# EAGLE board SHT1x-Breakout-Panel-v14 (EAGLE 7.3.0), part 1 of 2
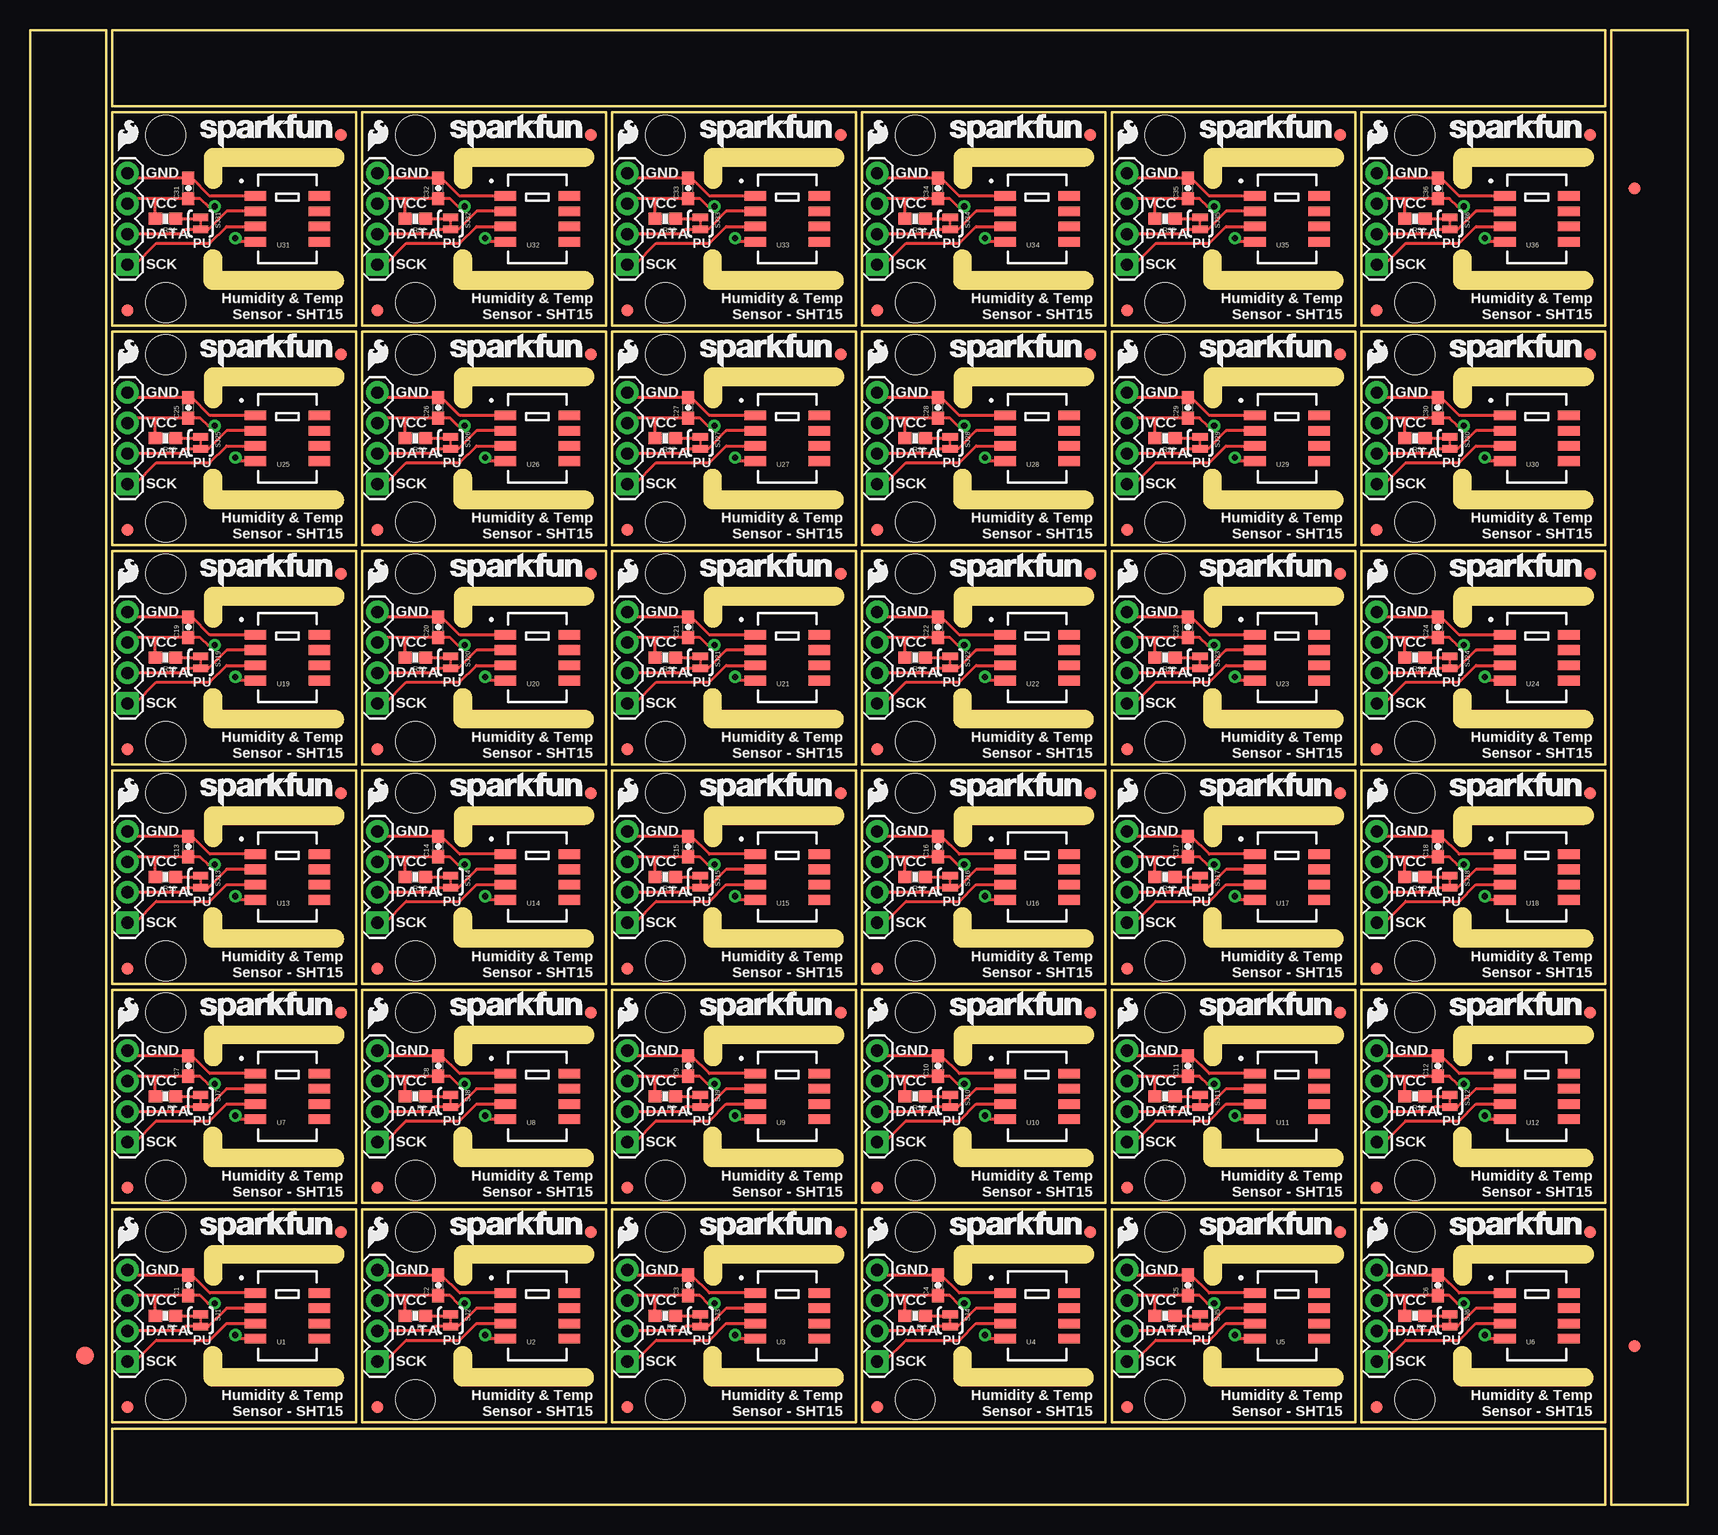
[diagram p0: board, top side]
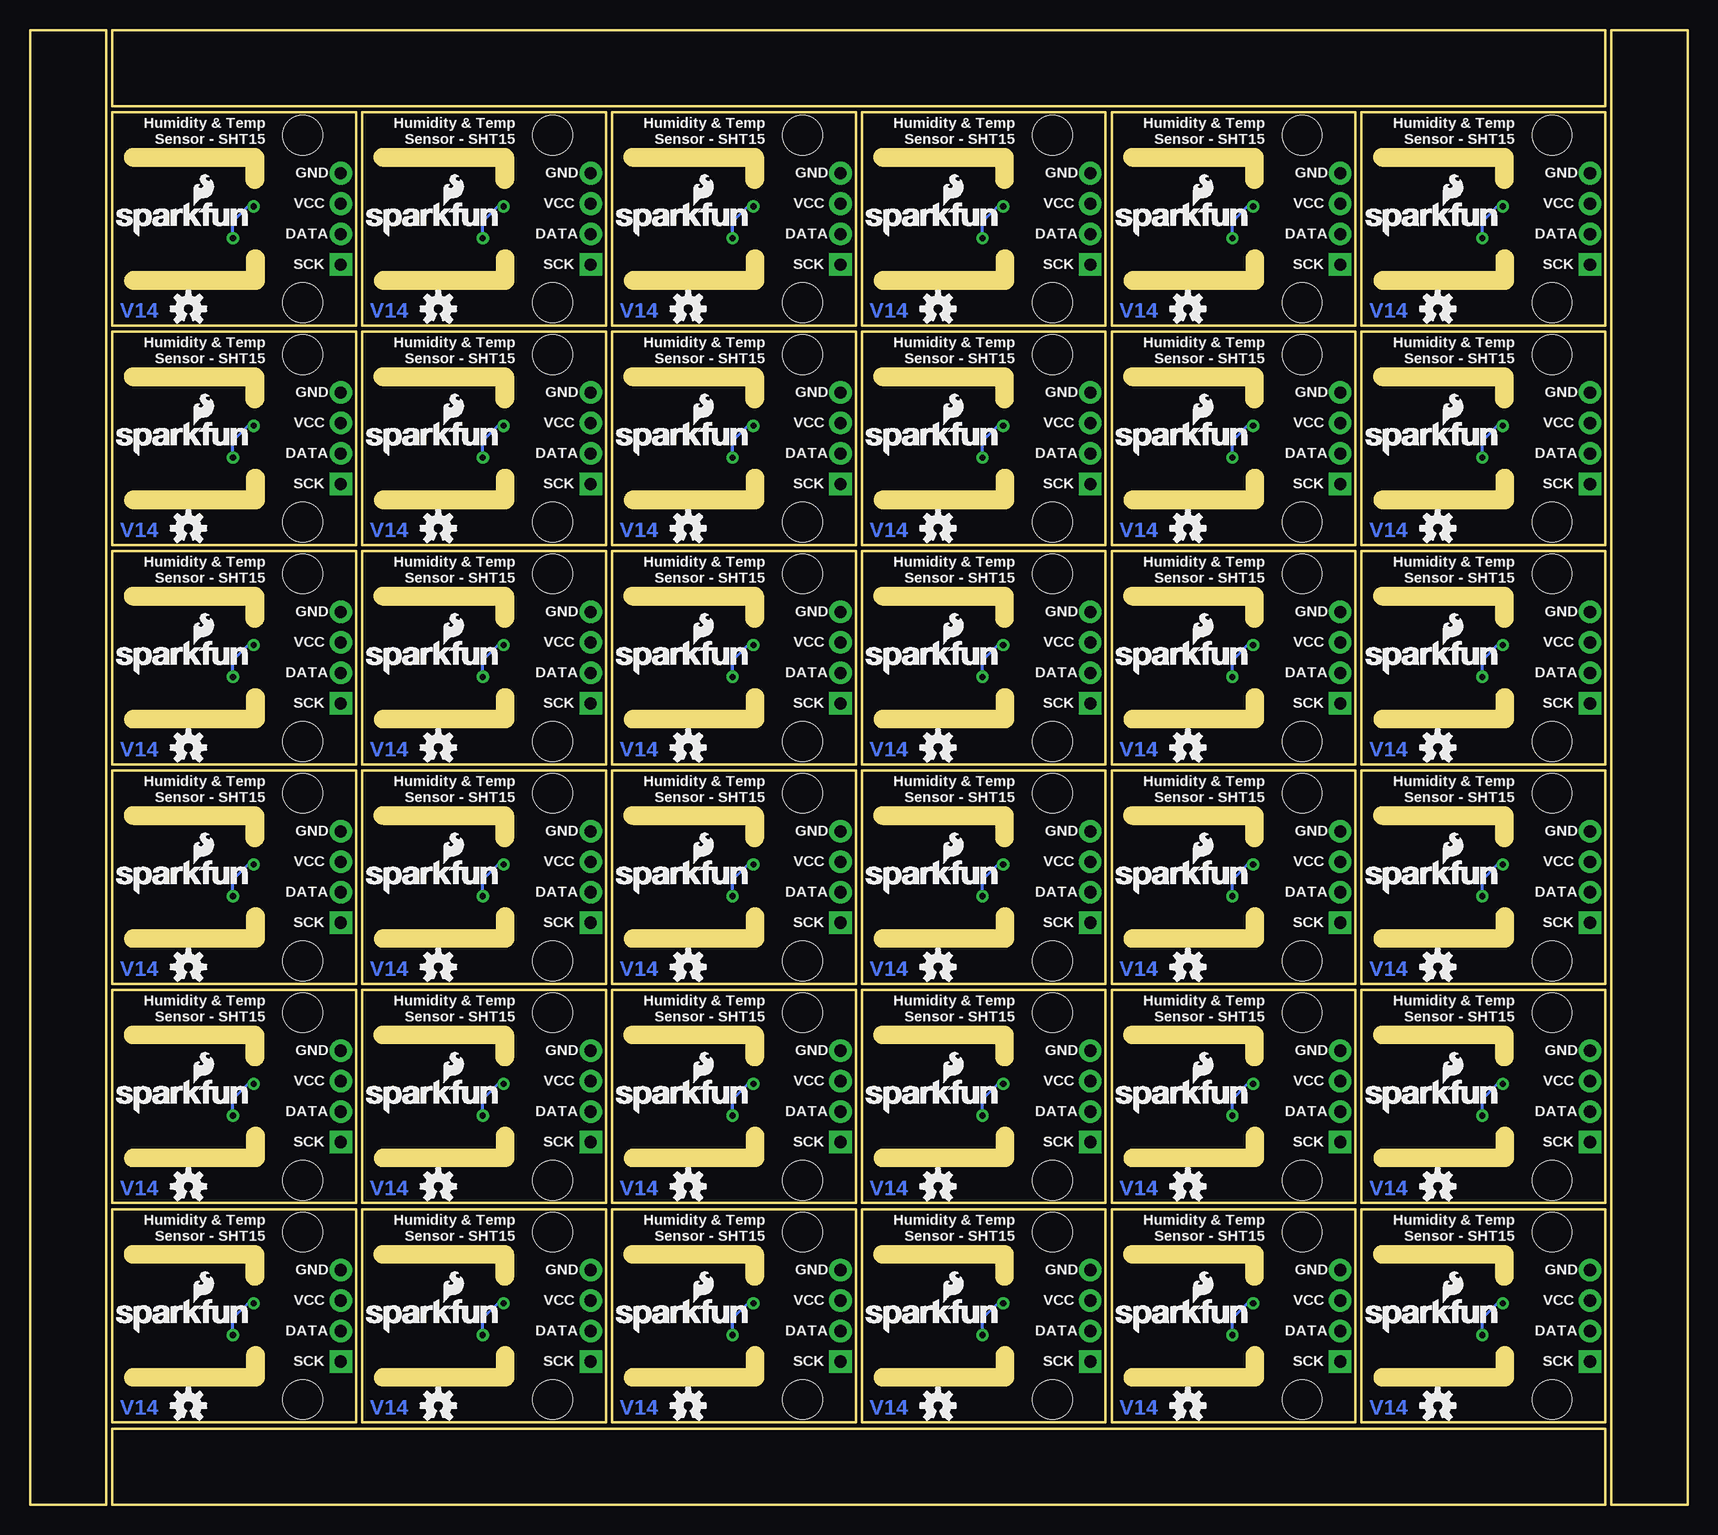
[diagram p1: board, bottom side, seen from below]

Size 138.18 x 122.94 mm. Coordinates in mm from the lower left corner, seen from the top.
Outline: 808 segments
Copper layers (1*16): Top 0.035mm / dielectric 1.5mm / Bottom 0.035mm
Design rules "SparkFun": minimum track width 8mil, minimum drill 20mil, track to track 8mil, track to pad 8mil, pad to pad 8mil, via to via 8mil, smd to smd 8mil, copper to edge 9mil, drill to drill 8mil, minimum pad ring 12mil, minimum via ring 10mil, stop-mask expansion 4mil, vias tented up to drill 20mil, thermal gap 10mil
Net classes: 0 default: width 0.203 mm; 1 power: width 0.305 mm
Milling: 144 lines

## Footprints (pad centres in the part's own frame; a part is rotated, then mirrored left to right if it is on the bottom)
0603-CAP = smd 1.1 x 1: 1 -0.85,0; 2 0.85,0
FIDUCIAL-1.5X3 = smd 1.5 x 1.5: 1 0,0
FIDUCIAL-1X2 = smd 1 x 1: 1 0,0
1X04 = drill 1.016 pad 1.88 square: 1 0,0 | drill 1.016 pad 1.88: 2 2.54,0; 3 5.08,0; 4 7.62,0
0603-RES = smd 1.1 x 1: 1 -0.85,0; 2 0.85,0
PAD-JUMPER-2-NC_BY_TRACE_YES_SILK = smd 0.635 x 1.27: 1 -0.508,0; 2 0.508,0
STAND-OFF = hole 3.302: 0,0
SHT1X = smd 1.8 x 0.8: 1 -2.667,1.905; 2 -2.667,0.635; 3 -2.667,-0.635; 4 -2.667,-1.905; 5 2.667,-1.905; 6 2.667,-0.635; 7 2.667,0.635; 8 2.667,1.905

## Placement (x,y rotation side)
C1  0.1uF  [0603-CAP]  13.21,18.29 90 top
C2  0.1uF  [0603-CAP]  34.04,18.29 90 top
C3  0.1uF  [0603-CAP]  54.86,18.29 90 top
C4  0.1uF  [0603-CAP]  75.69,18.29 90 top
C5  0.1uF  [0603-CAP]  96.52,18.29 90 top
C6  0.1uF  [0603-CAP]  117.35,18.29 90 top
C7  0.1uF  [0603-CAP]  13.21,36.58 90 top
C8  0.1uF  [0603-CAP]  34.04,36.58 90 top
C9  0.1uF  [0603-CAP]  54.86,36.58 90 top
C10  0.1uF  [0603-CAP]  75.69,36.58 90 top
C11  0.1uF  [0603-CAP]  96.52,36.58 90 top
C12  0.1uF  [0603-CAP]  117.35,36.58 90 top
C13  0.1uF  [0603-CAP]  13.21,54.86 90 top
C14  0.1uF  [0603-CAP]  34.04,54.86 90 top
C15  0.1uF  [0603-CAP]  54.86,54.86 90 top
C16  0.1uF  [0603-CAP]  75.69,54.86 90 top
C17  0.1uF  [0603-CAP]  96.52,54.86 90 top
C18  0.1uF  [0603-CAP]  117.35,54.86 90 top
C19  0.1uF  [0603-CAP]  13.21,73.15 90 top
C20  0.1uF  [0603-CAP]  34.04,73.15 90 top
C21  0.1uF  [0603-CAP]  54.86,73.15 90 top
C22  0.1uF  [0603-CAP]  75.69,73.15 90 top
C23  0.1uF  [0603-CAP]  96.52,73.15 90 top
C24  0.1uF  [0603-CAP]  117.35,73.15 90 top
C25  0.1uF  [0603-CAP]  13.21,91.44 90 top
C26  0.1uF  [0603-CAP]  34.04,91.44 90 top
C27  0.1uF  [0603-CAP]  54.86,91.44 90 top
C28  0.1uF  [0603-CAP]  75.69,91.44 90 top
C29  0.1uF  [0603-CAP]  96.52,91.44 90 top
C30  0.1uF  [0603-CAP]  117.35,91.44 90 top
C31  0.1uF  [0603-CAP]  13.21,109.73 90 top
C32  0.1uF  [0603-CAP]  34.04,109.73 90 top
C33  0.1uF  [0603-CAP]  54.86,109.73 90 top
C34  0.1uF  [0603-CAP]  75.69,109.73 90 top
C35  0.1uF  [0603-CAP]  96.52,109.73 90 top
C36  0.1uF  [0603-CAP]  117.35,109.73 90 top
E$1  [FIDUCIAL-1.5X3]  4.57,12.45 0 top
E$4  [FIDUCIAL-1X2]  133.73,13.21 0 top
E$5  [FIDUCIAL-1X2]  133.73,109.73 180 top
FID1  FIDUCIAL1X2  [FIDUCIAL-1X2]  25.91,22.73 0 top
FID2  FIDUCIAL1X2  [FIDUCIAL-1X2]  8.13,8.13 0 top
FID3  FIDUCIAL1X2  [FIDUCIAL-1X2]  46.74,22.73 0 top
FID4  FIDUCIAL1X2  [FIDUCIAL-1X2]  28.96,8.13 0 top
FID5  FIDUCIAL1X2  [FIDUCIAL-1X2]  67.56,22.73 0 top
FID6  FIDUCIAL1X2  [FIDUCIAL-1X2]  49.78,8.13 0 top
FID7  FIDUCIAL1X2  [FIDUCIAL-1X2]  88.39,22.73 0 top
FID8  FIDUCIAL1X2  [FIDUCIAL-1X2]  70.61,8.13 0 top
FID9  FIDUCIAL1X2  [FIDUCIAL-1X2]  109.22,22.73 0 top
FID10  FIDUCIAL1X2  [FIDUCIAL-1X2]  91.44,8.13 0 top
FID11  FIDUCIAL1X2  [FIDUCIAL-1X2]  130.05,22.73 0 top
FID12  FIDUCIAL1X2  [FIDUCIAL-1X2]  112.27,8.13 0 top
FID13  FIDUCIAL1X2  [FIDUCIAL-1X2]  25.91,41.02 0 top
FID14  FIDUCIAL1X2  [FIDUCIAL-1X2]  8.13,26.42 0 top
FID15  FIDUCIAL1X2  [FIDUCIAL-1X2]  46.74,41.02 0 top
FID16  FIDUCIAL1X2  [FIDUCIAL-1X2]  28.96,26.42 0 top
FID17  FIDUCIAL1X2  [FIDUCIAL-1X2]  67.56,41.02 0 top
FID18  FIDUCIAL1X2  [FIDUCIAL-1X2]  49.78,26.42 0 top
FID19  FIDUCIAL1X2  [FIDUCIAL-1X2]  88.39,41.02 0 top
FID20  FIDUCIAL1X2  [FIDUCIAL-1X2]  70.61,26.42 0 top
FID21  FIDUCIAL1X2  [FIDUCIAL-1X2]  109.22,41.02 0 top
FID22  FIDUCIAL1X2  [FIDUCIAL-1X2]  91.44,26.42 0 top
FID23  FIDUCIAL1X2  [FIDUCIAL-1X2]  130.05,41.02 0 top
FID24  FIDUCIAL1X2  [FIDUCIAL-1X2]  112.27,26.42 0 top
FID25  FIDUCIAL1X2  [FIDUCIAL-1X2]  25.91,59.31 0 top
FID26  FIDUCIAL1X2  [FIDUCIAL-1X2]  8.13,44.7 0 top
FID27  FIDUCIAL1X2  [FIDUCIAL-1X2]  46.74,59.31 0 top
FID28  FIDUCIAL1X2  [FIDUCIAL-1X2]  28.96,44.7 0 top
FID29  FIDUCIAL1X2  [FIDUCIAL-1X2]  67.56,59.31 0 top
FID30  FIDUCIAL1X2  [FIDUCIAL-1X2]  49.78,44.7 0 top
FID31  FIDUCIAL1X2  [FIDUCIAL-1X2]  88.39,59.31 0 top
FID32  FIDUCIAL1X2  [FIDUCIAL-1X2]  70.61,44.7 0 top
FID33  FIDUCIAL1X2  [FIDUCIAL-1X2]  109.22,59.31 0 top
FID34  FIDUCIAL1X2  [FIDUCIAL-1X2]  91.44,44.7 0 top
FID35  FIDUCIAL1X2  [FIDUCIAL-1X2]  130.05,59.31 0 top
FID36  FIDUCIAL1X2  [FIDUCIAL-1X2]  112.27,44.7 0 top
FID37  FIDUCIAL1X2  [FIDUCIAL-1X2]  25.91,77.6 0 top
FID38  FIDUCIAL1X2  [FIDUCIAL-1X2]  8.13,62.99 0 top
FID39  FIDUCIAL1X2  [FIDUCIAL-1X2]  46.74,77.6 0 top
FID40  FIDUCIAL1X2  [FIDUCIAL-1X2]  28.96,62.99 0 top
FID41  FIDUCIAL1X2  [FIDUCIAL-1X2]  67.56,77.6 0 top
FID42  FIDUCIAL1X2  [FIDUCIAL-1X2]  49.78,62.99 0 top
FID43  FIDUCIAL1X2  [FIDUCIAL-1X2]  88.39,77.6 0 top
FID44  FIDUCIAL1X2  [FIDUCIAL-1X2]  70.61,62.99 0 top
FID45  FIDUCIAL1X2  [FIDUCIAL-1X2]  109.22,77.6 0 top
FID46  FIDUCIAL1X2  [FIDUCIAL-1X2]  91.44,62.99 0 top
FID47  FIDUCIAL1X2  [FIDUCIAL-1X2]  130.05,77.6 0 top
FID48  FIDUCIAL1X2  [FIDUCIAL-1X2]  112.27,62.99 0 top
FID49  FIDUCIAL1X2  [FIDUCIAL-1X2]  25.91,95.89 0 top
FID50  FIDUCIAL1X2  [FIDUCIAL-1X2]  8.13,81.28 0 top
FID51  FIDUCIAL1X2  [FIDUCIAL-1X2]  46.74,95.89 0 top
FID52  FIDUCIAL1X2  [FIDUCIAL-1X2]  28.96,81.28 0 top
FID53  FIDUCIAL1X2  [FIDUCIAL-1X2]  67.56,95.89 0 top
FID54  FIDUCIAL1X2  [FIDUCIAL-1X2]  49.78,81.28 0 top
FID55  FIDUCIAL1X2  [FIDUCIAL-1X2]  88.39,95.89 0 top
FID56  FIDUCIAL1X2  [FIDUCIAL-1X2]  70.61,81.28 0 top
FID57  FIDUCIAL1X2  [FIDUCIAL-1X2]  109.22,95.89 0 top
FID58  FIDUCIAL1X2  [FIDUCIAL-1X2]  91.44,81.28 0 top
FID59  FIDUCIAL1X2  [FIDUCIAL-1X2]  130.05,95.89 0 top
FID60  FIDUCIAL1X2  [FIDUCIAL-1X2]  112.27,81.28 0 top
FID61  FIDUCIAL1X2  [FIDUCIAL-1X2]  25.91,114.17 0 top
FID62  FIDUCIAL1X2  [FIDUCIAL-1X2]  8.13,99.57 0 top
FID63  FIDUCIAL1X2  [FIDUCIAL-1X2]  46.74,114.17 0 top
FID64  FIDUCIAL1X2  [FIDUCIAL-1X2]  28.96,99.57 0 top
FID65  FIDUCIAL1X2  [FIDUCIAL-1X2]  67.56,114.17 0 top
FID66  FIDUCIAL1X2  [FIDUCIAL-1X2]  49.78,99.57 0 top
FID67  FIDUCIAL1X2  [FIDUCIAL-1X2]  88.39,114.17 0 top
FID68  FIDUCIAL1X2  [FIDUCIAL-1X2]  70.61,99.57 0 top
FID69  FIDUCIAL1X2  [FIDUCIAL-1X2]  109.22,114.17 0 top
FID70  FIDUCIAL1X2  [FIDUCIAL-1X2]  91.44,99.57 0 top
FID71  FIDUCIAL1X2  [FIDUCIAL-1X2]  130.05,114.17 0 top
FID72  FIDUCIAL1X2  [FIDUCIAL-1X2]  112.27,99.57 0 top
JP1  [1X04]  8.13,11.94 90 top
JP2  [1X04]  28.96,11.94 90 top
JP3  [1X04]  49.78,11.94 90 top
JP4  [1X04]  70.61,11.94 90 top
JP5  [1X04]  91.44,11.94 90 top
JP6  [1X04]  112.27,11.94 90 top
JP7  [1X04]  8.13,30.23 90 top
JP8  [1X04]  28.96,30.23 90 top
JP9  [1X04]  49.78,30.23 90 top
JP10  [1X04]  70.61,30.23 90 top
JP11  [1X04]  91.44,30.23 90 top
JP12  [1X04]  112.27,30.23 90 top
JP13  [1X04]  8.13,48.51 90 top
JP14  [1X04]  28.96,48.51 90 top
JP15  [1X04]  49.78,48.51 90 top
JP16  [1X04]  70.61,48.51 90 top
JP17  [1X04]  91.44,48.51 90 top
JP18  [1X04]  112.27,48.51 90 top
JP19  [1X04]  8.13,66.8 90 top
JP20  [1X04]  28.96,66.8 90 top
JP21  [1X04]  49.78,66.8 90 top
JP22  [1X04]  70.61,66.8 90 top
JP23  [1X04]  91.44,66.8 90 top
JP24  [1X04]  112.27,66.8 90 top
JP25  [1X04]  8.13,85.09 90 top
JP26  [1X04]  28.96,85.09 90 top
JP27  [1X04]  49.78,85.09 90 top
JP28  [1X04]  70.61,85.09 90 top
JP29  [1X04]  91.44,85.09 90 top
JP30  [1X04]  112.27,85.09 90 top
JP31  [1X04]  8.13,103.38 90 top
JP32  [1X04]  28.96,103.38 90 top
JP33  [1X04]  49.78,103.38 90 top
JP34  [1X04]  70.61,103.38 90 top
JP35  [1X04]  91.44,103.38 90 top
JP36  [1X04]  112.27,103.38 90 top
LOGO1  OSHW-LOGOS  [OSHW-LOGO-S]  20.83,8.26 0 bottom
LOGO2  SFE_LOGO_NAME.1_INCH  [SFE_LOGO_NAME_.1]  13.74,21.18 0 top
LOGO3  OSHW-LOGOS  [OSHW-LOGO-S]  41.66,8.26 0 bottom
LOGO4  SFE_LOGO_FLAME.1_INCH  [SFE_LOGO_FLAME_.1]  7.04,21.06 0 top
LOGO5  SFE_LOGO_NAME_FLAME.1_INCH  [SFE_LOGO_NAME_FLAME_.1]  27.25,14.22 0 bottom
LOGO6  SFE_LOGO_FLAME.1_INCH  [SFE_LOGO_FLAME_.1]  27.86,21.06 0 top
LOGO7  SFE_LOGO_NAME.1_INCH  [SFE_LOGO_NAME_.1]  34.57,21.18 0 top
LOGO8  SFE_LOGO_NAME_FLAME.1_INCH  [SFE_LOGO_NAME_FLAME_.1]  48.08,14.22 0 bottom
LOGO9  OSHW-LOGOS  [OSHW-LOGO-S]  62.48,8.26 0 bottom
LOGO10  SFE_LOGO_FLAME.1_INCH  [SFE_LOGO_FLAME_.1]  48.69,21.06 0 top
LOGO11  SFE_LOGO_NAME.1_INCH  [SFE_LOGO_NAME_.1]  55.4,21.18 0 top
LOGO12  SFE_LOGO_NAME_FLAME.1_INCH  [SFE_LOGO_NAME_FLAME_.1]  68.91,14.22 0 bottom
LOGO13  OSHW-LOGOS  [OSHW-LOGO-S]  83.31,8.26 0 bottom
LOGO14  SFE_LOGO_FLAME.1_INCH  [SFE_LOGO_FLAME_.1]  69.52,21.06 0 top
LOGO15  SFE_LOGO_NAME.1_INCH  [SFE_LOGO_NAME_.1]  76.23,21.18 0 top
LOGO16  SFE_LOGO_NAME_FLAME.1_INCH  [SFE_LOGO_NAME_FLAME_.1]  89.74,14.22 0 bottom
LOGO17  OSHW-LOGOS  [OSHW-LOGO-S]  104.14,8.26 0 bottom
LOGO18  SFE_LOGO_FLAME.1_INCH  [SFE_LOGO_FLAME_.1]  90.35,21.06 0 top
LOGO19  SFE_LOGO_NAME.1_INCH  [SFE_LOGO_NAME_.1]  97.05,21.18 0 top
LOGO20  SFE_LOGO_NAME_FLAME.1_INCH  [SFE_LOGO_NAME_FLAME_.1]  110.57,14.22 0 bottom
LOGO21  OSHW-LOGOS  [OSHW-LOGO-S]  124.97,8.26 0 bottom
LOGO22  SFE_LOGO_FLAME.1_INCH  [SFE_LOGO_FLAME_.1]  111.18,21.06 0 top
LOGO23  SFE_LOGO_NAME.1_INCH  [SFE_LOGO_NAME_.1]  117.88,21.18 0 top
LOGO24  SFE_LOGO_NAME_FLAME.1_INCH  [SFE_LOGO_NAME_FLAME_.1]  131.39,14.22 0 bottom
LOGO25  OSHW-LOGOS  [OSHW-LOGO-S]  20.83,26.54 0 bottom
LOGO26  SFE_LOGO_FLAME.1_INCH  [SFE_LOGO_FLAME_.1]  7.04,39.34 0 top
LOGO27  SFE_LOGO_NAME.1_INCH  [SFE_LOGO_NAME_.1]  13.74,39.47 0 top
LOGO28  SFE_LOGO_NAME_FLAME.1_INCH  [SFE_LOGO_NAME_FLAME_.1]  27.25,32.51 0 bottom
LOGO29  OSHW-LOGOS  [OSHW-LOGO-S]  41.66,26.54 0 bottom
LOGO30  SFE_LOGO_FLAME.1_INCH  [SFE_LOGO_FLAME_.1]  27.86,39.34 0 top
LOGO31  SFE_LOGO_NAME.1_INCH  [SFE_LOGO_NAME_.1]  34.57,39.47 0 top
LOGO32  SFE_LOGO_NAME_FLAME.1_INCH  [SFE_LOGO_NAME_FLAME_.1]  48.08,32.51 0 bottom
LOGO33  OSHW-LOGOS  [OSHW-LOGO-S]  62.48,26.54 0 bottom
LOGO34  SFE_LOGO_FLAME.1_INCH  [SFE_LOGO_FLAME_.1]  48.69,39.34 0 top
LOGO35  SFE_LOGO_NAME.1_INCH  [SFE_LOGO_NAME_.1]  55.4,39.47 0 top
LOGO36  SFE_LOGO_NAME_FLAME.1_INCH  [SFE_LOGO_NAME_FLAME_.1]  68.91,32.51 0 bottom
LOGO37  OSHW-LOGOS  [OSHW-LOGO-S]  83.31,26.54 0 bottom
LOGO38  SFE_LOGO_FLAME.1_INCH  [SFE_LOGO_FLAME_.1]  69.52,39.34 0 top
LOGO39  SFE_LOGO_NAME.1_INCH  [SFE_LOGO_NAME_.1]  76.23,39.47 0 top
LOGO40  SFE_LOGO_NAME_FLAME.1_INCH  [SFE_LOGO_NAME_FLAME_.1]  89.74,32.51 0 bottom
LOGO41  OSHW-LOGOS  [OSHW-LOGO-S]  104.14,26.54 0 bottom
LOGO42  SFE_LOGO_FLAME.1_INCH  [SFE_LOGO_FLAME_.1]  90.35,39.34 0 top
LOGO43  SFE_LOGO_NAME.1_INCH  [SFE_LOGO_NAME_.1]  97.05,39.47 0 top
LOGO44  SFE_LOGO_NAME_FLAME.1_INCH  [SFE_LOGO_NAME_FLAME_.1]  110.57,32.51 0 bottom
LOGO45  OSHW-LOGOS  [OSHW-LOGO-S]  124.97,26.54 0 bottom
LOGO46  SFE_LOGO_FLAME.1_INCH  [SFE_LOGO_FLAME_.1]  111.18,39.34 0 top
LOGO47  SFE_LOGO_NAME.1_INCH  [SFE_LOGO_NAME_.1]  117.88,39.47 0 top
LOGO48  SFE_LOGO_NAME_FLAME.1_INCH  [SFE_LOGO_NAME_FLAME_.1]  131.39,32.51 0 bottom
LOGO49  OSHW-LOGOS  [OSHW-LOGO-S]  20.83,44.83 0 bottom
LOGO50  SFE_LOGO_FLAME.1_INCH  [SFE_LOGO_FLAME_.1]  7.04,57.63 0 top
LOGO51  SFE_LOGO_NAME.1_INCH  [SFE_LOGO_NAME_.1]  13.74,57.76 0 top
LOGO52  SFE_LOGO_NAME_FLAME.1_INCH  [SFE_LOGO_NAME_FLAME_.1]  27.25,50.8 0 bottom
LOGO53  OSHW-LOGOS  [OSHW-LOGO-S]  41.66,44.83 0 bottom
LOGO54  SFE_LOGO_FLAME.1_INCH  [SFE_LOGO_FLAME_.1]  27.86,57.63 0 top
LOGO55  SFE_LOGO_NAME.1_INCH  [SFE_LOGO_NAME_.1]  34.57,57.76 0 top
LOGO56  SFE_LOGO_NAME_FLAME.1_INCH  [SFE_LOGO_NAME_FLAME_.1]  48.08,50.8 0 bottom
LOGO57  OSHW-LOGOS  [OSHW-LOGO-S]  62.48,44.83 0 bottom
LOGO58  SFE_LOGO_FLAME.1_INCH  [SFE_LOGO_FLAME_.1]  48.69,57.63 0 top
LOGO59  SFE_LOGO_NAME.1_INCH  [SFE_LOGO_NAME_.1]  55.4,57.76 0 top
LOGO60  SFE_LOGO_NAME_FLAME.1_INCH  [SFE_LOGO_NAME_FLAME_.1]  68.91,50.8 0 bottom
LOGO61  OSHW-LOGOS  [OSHW-LOGO-S]  83.31,44.83 0 bottom
LOGO62  SFE_LOGO_FLAME.1_INCH  [SFE_LOGO_FLAME_.1]  69.52,57.63 0 top
LOGO63  SFE_LOGO_NAME.1_INCH  [SFE_LOGO_NAME_.1]  76.23,57.76 0 top
LOGO64  SFE_LOGO_NAME_FLAME.1_INCH  [SFE_LOGO_NAME_FLAME_.1]  89.74,50.8 0 bottom
LOGO65  OSHW-LOGOS  [OSHW-LOGO-S]  104.14,44.83 0 bottom
LOGO66  SFE_LOGO_FLAME.1_INCH  [SFE_LOGO_FLAME_.1]  90.35,57.63 0 top
LOGO67  SFE_LOGO_NAME.1_INCH  [SFE_LOGO_NAME_.1]  97.05,57.76 0 top
LOGO68  SFE_LOGO_NAME_FLAME.1_INCH  [SFE_LOGO_NAME_FLAME_.1]  110.57,50.8 0 bottom
LOGO69  OSHW-LOGOS  [OSHW-LOGO-S]  124.97,44.83 0 bottom
LOGO70  SFE_LOGO_FLAME.1_INCH  [SFE_LOGO_FLAME_.1]  111.18,57.63 0 top
LOGO71  SFE_LOGO_NAME.1_INCH  [SFE_LOGO_NAME_.1]  117.88,57.76 0 top
LOGO72  SFE_LOGO_NAME_FLAME.1_INCH  [SFE_LOGO_NAME_FLAME_.1]  131.39,50.8 0 bottom
LOGO73  OSHW-LOGOS  [OSHW-LOGO-S]  20.83,63.12 0 bottom
LOGO74  SFE_LOGO_FLAME.1_INCH  [SFE_LOGO_FLAME_.1]  7.04,75.92 0 top
LOGO75  SFE_LOGO_NAME.1_INCH  [SFE_LOGO_NAME_.1]  13.74,76.05 0 top
LOGO76  SFE_LOGO_NAME_FLAME.1_INCH  [SFE_LOGO_NAME_FLAME_.1]  27.25,69.09 0 bottom
LOGO77  OSHW-LOGOS  [OSHW-LOGO-S]  41.66,63.12 0 bottom
LOGO78  SFE_LOGO_FLAME.1_INCH  [SFE_LOGO_FLAME_.1]  27.86,75.92 0 top
LOGO79  SFE_LOGO_NAME.1_INCH  [SFE_LOGO_NAME_.1]  34.57,76.05 0 top
LOGO80  SFE_LOGO_NAME_FLAME.1_INCH  [SFE_LOGO_NAME_FLAME_.1]  48.08,69.09 0 bottom
LOGO81  OSHW-LOGOS  [OSHW-LOGO-S]  62.48,63.12 0 bottom
LOGO82  SFE_LOGO_FLAME.1_INCH  [SFE_LOGO_FLAME_.1]  48.69,75.92 0 top
LOGO83  SFE_LOGO_NAME.1_INCH  [SFE_LOGO_NAME_.1]  55.4,76.05 0 top
LOGO84  SFE_LOGO_NAME_FLAME.1_INCH  [SFE_LOGO_NAME_FLAME_.1]  68.91,69.09 0 bottom
LOGO85  OSHW-LOGOS  [OSHW-LOGO-S]  83.31,63.12 0 bottom
LOGO86  SFE_LOGO_FLAME.1_INCH  [SFE_LOGO_FLAME_.1]  69.52,75.92 0 top
LOGO87  SFE_LOGO_NAME.1_INCH  [SFE_LOGO_NAME_.1]  76.23,76.05 0 top
LOGO88  SFE_LOGO_NAME_FLAME.1_INCH  [SFE_LOGO_NAME_FLAME_.1]  89.74,69.09 0 bottom
LOGO89  OSHW-LOGOS  [OSHW-LOGO-S]  104.14,63.12 0 bottom
LOGO90  SFE_LOGO_FLAME.1_INCH  [SFE_LOGO_FLAME_.1]  90.35,75.92 0 top
LOGO91  SFE_LOGO_NAME.1_INCH  [SFE_LOGO_NAME_.1]  97.05,76.05 0 top
LOGO92  SFE_LOGO_NAME_FLAME.1_INCH  [SFE_LOGO_NAME_FLAME_.1]  110.57,69.09 0 bottom
LOGO93  OSHW-LOGOS  [OSHW-LOGO-S]  124.97,63.12 0 bottom
LOGO94  SFE_LOGO_FLAME.1_INCH  [SFE_LOGO_FLAME_.1]  111.18,75.92 0 top
LOGO95  SFE_LOGO_NAME.1_INCH  [SFE_LOGO_NAME_.1]  117.88,76.05 0 top
LOGO96  SFE_LOGO_NAME_FLAME.1_INCH  [SFE_LOGO_NAME_FLAME_.1]  131.39,69.09 0 bottom
LOGO97  OSHW-LOGOS  [OSHW-LOGO-S]  20.83,81.41 0 bottom
LOGO98  SFE_LOGO_FLAME.1_INCH  [SFE_LOGO_FLAME_.1]  7.04,94.21 0 top
LOGO99  SFE_LOGO_NAME.1_INCH  [SFE_LOGO_NAME_.1]  13.74,94.34 0 top
LOGO100  SFE_LOGO_NAME_FLAME.1_INCH  [SFE_LOGO_NAME_FLAME_.1]  27.25,87.38 0 bottom
LOGO101  OSHW-LOGOS  [OSHW-LOGO-S]  41.66,81.41 0 bottom
LOGO102  SFE_LOGO_FLAME.1_INCH  [SFE_LOGO_FLAME_.1]  27.86,94.21 0 top
LOGO103  SFE_LOGO_NAME.1_INCH  [SFE_LOGO_NAME_.1]  34.57,94.34 0 top
LOGO104  SFE_LOGO_NAME_FLAME.1_INCH  [SFE_LOGO_NAME_FLAME_.1]  48.08,87.38 0 bottom
LOGO105  OSHW-LOGOS  [OSHW-LOGO-S]  62.48,81.41 0 bottom
LOGO106  SFE_LOGO_FLAME.1_INCH  [SFE_LOGO_FLAME_.1]  48.69,94.21 0 top
LOGO107  SFE_LOGO_NAME.1_INCH  [SFE_LOGO_NAME_.1]  55.4,94.34 0 top
LOGO108  SFE_LOGO_NAME_FLAME.1_INCH  [SFE_LOGO_NAME_FLAME_.1]  68.91,87.38 0 bottom
LOGO109  OSHW-LOGOS  [OSHW-LOGO-S]  83.31,81.41 0 bottom
LOGO110  SFE_LOGO_FLAME.1_INCH  [SFE_LOGO_FLAME_.1]  69.52,94.21 0 top
LOGO111  SFE_LOGO_NAME.1_INCH  [SFE_LOGO_NAME_.1]  76.23,94.34 0 top
LOGO112  SFE_LOGO_NAME_FLAME.1_INCH  [SFE_LOGO_NAME_FLAME_.1]  89.74,87.38 0 bottom
LOGO113  OSHW-LOGOS  [OSHW-LOGO-S]  104.14,81.41 0 bottom
LOGO114  SFE_LOGO_FLAME.1_INCH  [SFE_LOGO_FLAME_.1]  90.35,94.21 0 top
LOGO115  SFE_LOGO_NAME.1_INCH  [SFE_LOGO_NAME_.1]  97.05,94.34 0 top
LOGO116  SFE_LOGO_NAME_FLAME.1_INCH  [SFE_LOGO_NAME_FLAME_.1]  110.57,87.38 0 bottom
LOGO117  OSHW-LOGOS  [OSHW-LOGO-S]  124.97,81.41 0 bottom
LOGO118  SFE_LOGO_FLAME.1_INCH  [SFE_LOGO_FLAME_.1]  111.18,94.21 0 top
LOGO119  SFE_LOGO_NAME.1_INCH  [SFE_LOGO_NAME_.1]  117.88,94.34 0 top
LOGO120  SFE_LOGO_NAME_FLAME.1_INCH  [SFE_LOGO_NAME_FLAME_.1]  131.39,87.38 0 bottom
LOGO121  OSHW-LOGOS  [OSHW-LOGO-S]  20.83,99.69 0 bottom
LOGO122  SFE_LOGO_FLAME.1_INCH  [SFE_LOGO_FLAME_.1]  7.04,112.5 0 top
LOGO123  SFE_LOGO_NAME.1_INCH  [SFE_LOGO_NAME_.1]  13.74,112.62 0 top
LOGO124  SFE_LOGO_NAME_FLAME.1_INCH  [SFE_LOGO_NAME_FLAME_.1]  27.25,105.66 0 bottom
LOGO125  OSHW-LOGOS  [OSHW-LOGO-S]  41.66,99.69 0 bottom
LOGO126  SFE_LOGO_FLAME.1_INCH  [SFE_LOGO_FLAME_.1]  27.86,112.5 0 top
LOGO127  SFE_LOGO_NAME.1_INCH  [SFE_LOGO_NAME_.1]  34.57,112.62 0 top
LOGO128  SFE_LOGO_NAME_FLAME.1_INCH  [SFE_LOGO_NAME_FLAME_.1]  48.08,105.66 0 bottom
LOGO129  OSHW-LOGOS  [OSHW-LOGO-S]  62.48,99.69 0 bottom
LOGO130  SFE_LOGO_FLAME.1_INCH  [SFE_LOGO_FLAME_.1]  48.69,112.5 0 top
LOGO131  SFE_LOGO_NAME.1_INCH  [SFE_LOGO_NAME_.1]  55.4,112.62 0 top
LOGO132  SFE_LOGO_NAME_FLAME.1_INCH  [SFE_LOGO_NAME_FLAME_.1]  68.91,105.66 0 bottom
LOGO133  OSHW-LOGOS  [OSHW-LOGO-S]  83.31,99.69 0 bottom
LOGO134  SFE_LOGO_FLAME.1_INCH  [SFE_LOGO_FLAME_.1]  69.52,112.5 0 top
LOGO135  SFE_LOGO_NAME.1_INCH  [SFE_LOGO_NAME_.1]  76.23,112.62 0 top
LOGO136  SFE_LOGO_NAME_FLAME.1_INCH  [SFE_LOGO_NAME_FLAME_.1]  89.74,105.66 0 bottom
LOGO137  OSHW-LOGOS  [OSHW-LOGO-S]  104.14,99.69 0 bottom
LOGO138  SFE_LOGO_FLAME.1_INCH  [SFE_LOGO_FLAME_.1]  90.35,112.5 0 top
LOGO139  SFE_LOGO_NAME.1_INCH  [SFE_LOGO_NAME_.1]  97.05,112.62 0 top
LOGO140  SFE_LOGO_NAME_FLAME.1_INCH  [SFE_LOGO_NAME_FLAME_.1]  110.57,105.66 0 bottom
LOGO141  OSHW-LOGOS  [OSHW-LOGO-S]  124.97,99.69 0 bottom
LOGO142  SFE_LOGO_FLAME.1_INCH  [SFE_LOGO_FLAME_.1]  111.18,112.5 0 top
LOGO143  SFE_LOGO_NAME.1_INCH  [SFE_LOGO_NAME_.1]  117.88,112.62 0 top
LOGO144  SFE_LOGO_NAME_FLAME.1_INCH  [SFE_LOGO_NAME_FLAME_.1]  131.39,105.66 0 bottom
R1  10K  [0603-RES]  11.3,15.75 180 top
R2  10K  [0603-RES]  32.13,15.75 180 top
R3  10K  [0603-RES]  52.96,15.75 180 top
R4  10K  [0603-RES]  73.79,15.75 180 top
R5  10K  [0603-RES]  94.61,15.75 180 top
R6  10K  [0603-RES]  115.44,15.75 180 top
R7  10K  [0603-RES]  11.3,34.04 180 top
R8  10K  [0603-RES]  32.13,34.04 180 top
R9  10K  [0603-RES]  52.96,34.04 180 top
R10  10K  [0603-RES]  73.79,34.04 180 top
R11  10K  [0603-RES]  94.61,34.04 180 top
R12  10K  [0603-RES]  115.44,34.04 180 top
R13  10K  [0603-RES]  11.3,52.32 180 top
R14  10K  [0603-RES]  32.13,52.32 180 top
R15  10K  [0603-RES]  52.96,52.32 180 top
R16  10K  [0603-RES]  73.79,52.32 180 top
R17  10K  [0603-RES]  94.61,52.32 180 top
R18  10K  [0603-RES]  115.44,52.32 180 top
R19  10K  [0603-RES]  11.3,70.61 180 top
R20  10K  [0603-RES]  32.13,70.61 180 top
R21  10K  [0603-RES]  52.96,70.61 180 top
R22  10K  [0603-RES]  73.79,70.61 180 top
R23  10K  [0603-RES]  94.61,70.61 180 top
R24  10K  [0603-RES]  115.44,70.61 180 top
R25  10K  [0603-RES]  11.3,88.9 180 top
R26  10K  [0603-RES]  32.13,88.9 180 top
R27  10K  [0603-RES]  52.96,88.9 180 top
R28  10K  [0603-RES]  73.79,88.9 180 top
R29  10K  [0603-RES]  94.61,88.9 180 top
R30  10K  [0603-RES]  115.44,88.9 180 top
R31  10K  [0603-RES]  11.3,107.19 180 top
R32  10K  [0603-RES]  32.13,107.19 180 top
R33  10K  [0603-RES]  52.96,107.19 180 top
R34  10K  [0603-RES]  73.79,107.19 180 top
R35  10K  [0603-RES]  94.61,107.19 180 top
R36  10K  [0603-RES]  115.44,107.19 180 top
SJ1  JUMPER  [PAD-JUMPER-2-NC_BY_TRACE_YES_SILK]  14.22,15.37 270 top
SJ2  JUMPER  [PAD-JUMPER-2-NC_BY_TRACE_YES_SILK]  35.05,15.37 270 top
SJ3  JUMPER  [PAD-JUMPER-2-NC_BY_TRACE_YES_SILK]  55.88,15.37 270 top
SJ4  JUMPER  [PAD-JUMPER-2-NC_BY_TRACE_YES_SILK]  76.71,15.37 270 top
SJ5  JUMPER  [PAD-JUMPER-2-NC_BY_TRACE_YES_SILK]  97.54,15.37 270 top
SJ6  JUMPER  [PAD-JUMPER-2-NC_BY_TRACE_YES_SILK]  118.36,15.37 270 top
SJ7  JUMPER  [PAD-JUMPER-2-NC_BY_TRACE_YES_SILK]  14.22,33.66 270 top
SJ8  JUMPER  [PAD-JUMPER-2-NC_BY_TRACE_YES_SILK]  35.05,33.66 270 top
SJ9  JUMPER  [PAD-JUMPER-2-NC_BY_TRACE_YES_SILK]  55.88,33.66 270 top
SJ10  JUMPER  [PAD-JUMPER-2-NC_BY_TRACE_YES_SILK]  76.71,33.66 270 top
SJ11  JUMPER  [PAD-JUMPER-2-NC_BY_TRACE_YES_SILK]  97.54,33.66 270 top
SJ12  JUMPER  [PAD-JUMPER-2-NC_BY_TRACE_YES_SILK]  118.36,33.66 270 top
SJ13  JUMPER  [PAD-JUMPER-2-NC_BY_TRACE_YES_SILK]  14.22,51.94 270 top
SJ14  JUMPER  [PAD-JUMPER-2-NC_BY_TRACE_YES_SILK]  35.05,51.94 270 top
SJ15  JUMPER  [PAD-JUMPER-2-NC_BY_TRACE_YES_SILK]  55.88,51.94 270 top
SJ16  JUMPER  [PAD-JUMPER-2-NC_BY_TRACE_YES_SILK]  76.71,51.94 270 top
SJ17  JUMPER  [PAD-JUMPER-2-NC_BY_TRACE_YES_SILK]  97.54,51.94 270 top
SJ18  JUMPER  [PAD-JUMPER-2-NC_BY_TRACE_YES_SILK]  118.36,51.94 270 top
SJ19  JUMPER  [PAD-JUMPER-2-NC_BY_TRACE_YES_SILK]  14.22,70.23 270 top
SJ20  JUMPER  [PAD-JUMPER-2-NC_BY_TRACE_YES_SILK]  35.05,70.23 270 top
SJ21  JUMPER  [PAD-JUMPER-2-NC_BY_TRACE_YES_SILK]  55.88,70.23 270 top
SJ22  JUMPER  [PAD-JUMPER-2-NC_BY_TRACE_YES_SILK]  76.71,70.23 270 top
SJ23  JUMPER  [PAD-JUMPER-2-NC_BY_TRACE_YES_SILK]  97.54,70.23 270 top
SJ24  JUMPER  [PAD-JUMPER-2-NC_BY_TRACE_YES_SILK]  118.36,70.23 270 top
SJ25  JUMPER  [PAD-JUMPER-2-NC_BY_TRACE_YES_SILK]  14.22,88.52 270 top
SJ26  JUMPER  [PAD-JUMPER-2-NC_BY_TRACE_YES_SILK]  35.05,88.52 270 top
SJ27  JUMPER  [PAD-JUMPER-2-NC_BY_TRACE_YES_SILK]  55.88,88.52 270 top
SJ28  JUMPER  [PAD-JUMPER-2-NC_BY_TRACE_YES_SILK]  76.71,88.52 270 top
SJ29  JUMPER  [PAD-JUMPER-2-NC_BY_TRACE_YES_SILK]  97.54,88.52 270 top
SJ30  JUMPER  [PAD-JUMPER-2-NC_BY_TRACE_YES_SILK]  118.36,88.52 270 top
SJ31  JUMPER  [PAD-JUMPER-2-NC_BY_TRACE_YES_SILK]  14.22,106.81 270 top
SJ32  JUMPER  [PAD-JUMPER-2-NC_BY_TRACE_YES_SILK]  35.05,106.81 270 top
SJ33  JUMPER  [PAD-JUMPER-2-NC_BY_TRACE_YES_SILK]  55.88,106.81 270 top
SJ34  JUMPER  [PAD-JUMPER-2-NC_BY_TRACE_YES_SILK]  76.71,106.81 270 top
SJ35  JUMPER  [PAD-JUMPER-2-NC_BY_TRACE_YES_SILK]  97.54,106.81 270 top
SJ36  JUMPER  [PAD-JUMPER-2-NC_BY_TRACE_YES_SILK]  118.36,106.81 270 top
STANDOFF1  STAND-OFF  [STAND-OFF]  11.3,22.73 0 top
STANDOFF2  STAND-OFF  [STAND-OFF]  11.3,8.76 0 top
STANDOFF3  STAND-OFF  [STAND-OFF]  32.13,22.73 0 top
STANDOFF4  STAND-OFF  [STAND-OFF]  32.13,8.76 0 top
STANDOFF5  STAND-OFF  [STAND-OFF]  52.96,22.73 0 top
STANDOFF6  STAND-OFF  [STAND-OFF]  52.96,8.76 0 top
STANDOFF7  STAND-OFF  [STAND-OFF]  73.79,22.73 0 top
STANDOFF8  STAND-OFF  [STAND-OFF]  73.79,8.76 0 top
STANDOFF9  STAND-OFF  [STAND-OFF]  94.61,22.73 0 top
STANDOFF10  STAND-OFF  [STAND-OFF]  94.61,8.76 0 top
STANDOFF11  STAND-OFF  [STAND-OFF]  115.44,22.73 0 top
STANDOFF12  STAND-OFF  [STAND-OFF]  115.44,8.76 0 top
STANDOFF13  STAND-OFF  [STAND-OFF]  11.3,41.02 0 top
STANDOFF14  STAND-OFF  [STAND-OFF]  11.3,27.05 0 top
STANDOFF15  STAND-OFF  [STAND-OFF]  32.13,41.02 0 top
STANDOFF16  STAND-OFF  [STAND-OFF]  32.13,27.05 0 top
STANDOFF17  STAND-OFF  [STAND-OFF]  52.96,41.02 0 top
STANDOFF18  STAND-OFF  [STAND-OFF]  52.96,27.05 0 top
STANDOFF19  STAND-OFF  [STAND-OFF]  73.79,41.02 0 top
STANDOFF20  STAND-OFF  [STAND-OFF]  73.79,27.05 0 top
STANDOFF21  STAND-OFF  [STAND-OFF]  94.61,41.02 0 top
STANDOFF22  STAND-OFF  [STAND-OFF]  94.61,27.05 0 top
STANDOFF23  STAND-OFF  [STAND-OFF]  115.44,41.02 0 top
STANDOFF24  STAND-OFF  [STAND-OFF]  115.44,27.05 0 top
STANDOFF25  STAND-OFF  [STAND-OFF]  11.3,59.31 0 top
STANDOFF26  STAND-OFF  [STAND-OFF]  11.3,45.34 0 top
STANDOFF27  STAND-OFF  [STAND-OFF]  32.13,59.31 0 top
STANDOFF28  STAND-OFF  [STAND-OFF]  32.13,45.34 0 top
STANDOFF29  STAND-OFF  [STAND-OFF]  52.96,59.31 0 top
STANDOFF30  STAND-OFF  [STAND-OFF]  52.96,45.34 0 top
STANDOFF31  STAND-OFF  [STAND-OFF]  73.79,59.31 0 top
STANDOFF32  STAND-OFF  [STAND-OFF]  73.79,45.34 0 top
STANDOFF33  STAND-OFF  [STAND-OFF]  94.61,59.31 0 top
STANDOFF34  STAND-OFF  [STAND-OFF]  94.61,45.34 0 top
STANDOFF35  STAND-OFF  [STAND-OFF]  115.44,59.31 0 top
STANDOFF36  STAND-OFF  [STAND-OFF]  115.44,45.34 0 top
STANDOFF37  STAND-OFF  [STAND-OFF]  11.3,77.6 0 top
STANDOFF38  STAND-OFF  [STAND-OFF]  11.3,63.63 0 top
STANDOFF39  STAND-OFF  [STAND-OFF]  32.13,77.6 0 top
STANDOFF40  STAND-OFF  [STAND-OFF]  32.13,63.63 0 top
STANDOFF41  STAND-OFF  [STAND-OFF]  52.96,77.6 0 top
STANDOFF42  STAND-OFF  [STAND-OFF]  52.96,63.63 0 top
STANDOFF43  STAND-OFF  [STAND-OFF]  73.79,77.6 0 top
STANDOFF44  STAND-OFF  [STAND-OFF]  73.79,63.63 0 top
STANDOFF45  STAND-OFF  [STAND-OFF]  94.61,77.6 0 top
STANDOFF46  STAND-OFF  [STAND-OFF]  94.61,63.63 0 top
STANDOFF47  STAND-OFF  [STAND-OFF]  115.44,77.6 0 top
STANDOFF48  STAND-OFF  [STAND-OFF]  115.44,63.63 0 top
STANDOFF49  STAND-OFF  [STAND-OFF]  11.3,95.89 0 top
STANDOFF50  STAND-OFF  [STAND-OFF]  11.3,81.92 0 top
STANDOFF51  STAND-OFF  [STAND-OFF]  32.13,95.89 0 top
STANDOFF52  STAND-OFF  [STAND-OFF]  32.13,81.92 0 top
STANDOFF53  STAND-OFF  [STAND-OFF]  52.96,95.89 0 top
STANDOFF54  STAND-OFF  [STAND-OFF]  52.96,81.92 0 top
STANDOFF55  STAND-OFF  [STAND-OFF]  73.79,95.89 0 top
STANDOFF56  STAND-OFF  [STAND-OFF]  73.79,81.92 0 top
STANDOFF57  STAND-OFF  [STAND-OFF]  94.61,95.89 0 top
STANDOFF58  STAND-OFF  [STAND-OFF]  94.61,81.92 0 top
STANDOFF59  STAND-OFF  [STAND-OFF]  115.44,95.89 0 top
STANDOFF60  STAND-OFF  [STAND-OFF]  115.44,81.92 0 top
STANDOFF61  STAND-OFF  [STAND-OFF]  11.3,114.17 0 top
STANDOFF62  STAND-OFF  [STAND-OFF]  11.3,100.2 0 top
STANDOFF63  STAND-OFF  [STAND-OFF]  32.13,114.17 0 top
STANDOFF64  STAND-OFF  [STAND-OFF]  32.13,100.2 0 top
STANDOFF65  STAND-OFF  [STAND-OFF]  52.96,114.17 0 top
STANDOFF66  STAND-OFF  [STAND-OFF]  52.96,100.2 0 top
STANDOFF67  STAND-OFF  [STAND-OFF]  73.79,114.17 0 top
STANDOFF68  STAND-OFF  [STAND-OFF]  73.79,100.2 0 top
STANDOFF69  STAND-OFF  [STAND-OFF]  94.61,114.17 0 top
STANDOFF70  STAND-OFF  [STAND-OFF]  94.61,100.2 0 top
STANDOFF71  STAND-OFF  [STAND-OFF]  115.44,114.17 0 top
STANDOFF72  STAND-OFF  [STAND-OFF]  115.44,100.2 0 top
U1  SHT1XSMD  [SHT1X]  21.46,15.75 0 top
U2  SHT1XSMD  [SHT1X]  42.29,15.75 0 top
U3  SHT1XSMD  [SHT1X]  63.12,15.75 0 top
U4  SHT1XSMD  [SHT1X]  83.95,15.75 0 top
U5  SHT1XSMD  [SHT1X]  104.78,15.75 0 top
U6  SHT1XSMD  [SHT1X]  125.6,15.75 0 top
U7  SHT1XSMD  [SHT1X]  21.46,34.04 0 top
U8  SHT1XSMD  [SHT1X]  42.29,34.04 0 top
U9  SHT1XSMD  [SHT1X]  63.12,34.04 0 top
U10  SHT1XSMD  [SHT1X]  83.95,34.04 0 top
U11  SHT1XSMD  [SHT1X]  104.78,34.04 0 top
U12  SHT1XSMD  [SHT1X]  125.6,34.04 0 top
U13  SHT1XSMD  [SHT1X]  21.46,52.32 0 top
U14  SHT1XSMD  [SHT1X]  42.29,52.32 0 top
U15  SHT1XSMD  [SHT1X]  63.12,52.32 0 top
U16  SHT1XSMD  [SHT1X]  83.95,52.32 0 top
U17  SHT1XSMD  [SHT1X]  104.78,52.32 0 top
U18  SHT1XSMD  [SHT1X]  125.6,52.32 0 top
U19  SHT1XSMD  [SHT1X]  21.46,70.61 0 top
U20  SHT1XSMD  [SHT1X]  42.29,70.61 0 top
U21  SHT1XSMD  [SHT1X]  63.12,70.61 0 top
U22  SHT1XSMD  [SHT1X]  83.95,70.61 0 top
U23  SHT1XSMD  [SHT1X]  104.78,70.61 0 top
U24  SHT1XSMD  [SHT1X]  125.6,70.61 0 top
U25  SHT1XSMD  [SHT1X]  21.46,88.9 0 top
U26  SHT1XSMD  [SHT1X]  42.29,88.9 0 top
U27  SHT1XSMD  [SHT1X]  63.12,88.9 0 top
U28  SHT1XSMD  [SHT1X]  83.95,88.9 0 top
U29  SHT1XSMD  [SHT1X]  104.78,88.9 0 top
U30  SHT1XSMD  [SHT1X]  125.6,88.9 0 top
U31  SHT1XSMD  [SHT1X]  21.46,107.19 0 top
U32  SHT1XSMD  [SHT1X]  42.29,107.19 0 top
U33  SHT1XSMD  [SHT1X]  63.12,107.19 0 top
U34  SHT1XSMD  [SHT1X]  83.95,107.19 0 top
U35  SHT1XSMD  [SHT1X]  104.78,107.19 0 top
U36  SHT1XSMD  [SHT1X]  125.6,107.19 0 top

## Library data of the parts
C1-C36 = SparkFun-Capacitors; PROD_ID: CAP-00810
E$1 = SparkFun-Retired
E$4 E$5 FID1-FID72 LOGO1-LOGO144 = SparkFun-Aesthetics
JP1-JP36 = SparkFun
R1-R36 = SparkFun-Resistors; PROD_ID: RES-00824
SJ1-SJ36 = SparkFun-Passives
STANDOFF1-STANDOFF72 = SparkFun-Electromechanical
U1-U36 = SparkFun-Sensors; PROD_ID: IC-08303

## Nets
DATA: JP1.2 SJ1.2 U1.2
DATA1: JP2.2 SJ2.2 U2.2
DATA2: JP3.2 SJ3.2 U3.2
DATA3: JP4.2 SJ4.2 U4.2
DATA4: JP5.2 SJ5.2 U5.2
DATA5: JP6.2 SJ6.2 U6.2
DATA6: JP7.2 SJ7.2 U7.2
DATA7: JP8.2 SJ8.2 U8.2
DATA8: JP9.2 SJ9.2 U9.2
DATA9: JP10.2 SJ10.2 U10.2
DATA10: JP11.2 SJ11.2 U11.2
DATA11: JP12.2 SJ12.2 U12.2
DATA12: JP13.2 SJ13.2 U13.2
DATA13: JP14.2 SJ14.2 U14.2
DATA14: JP15.2 SJ15.2 U15.2
DATA15: JP16.2 SJ16.2 U16.2
DATA16: JP17.2 SJ17.2 U17.2
DATA17: JP18.2 SJ18.2 U18.2
DATA18: JP19.2 SJ19.2 U19.2
DATA19: JP20.2 SJ20.2 U20.2
DATA20: JP21.2 SJ21.2 U21.2
DATA21: JP22.2 SJ22.2 U22.2
DATA22: JP23.2 SJ23.2 U23.2
DATA23: JP24.2 SJ24.2 U24.2
DATA24: JP25.2 SJ25.2 U25.2
DATA25: JP26.2 SJ26.2 U26.2
DATA26: JP27.2 SJ27.2 U27.2
DATA27: JP28.2 SJ28.2 U28.2
DATA28: JP29.2 SJ29.2 U29.2
DATA29: JP30.2 SJ30.2 U30.2
DATA30: JP31.2 SJ31.2 U31.2
DATA31: JP32.2 SJ32.2 U32.2
DATA32: JP33.2 SJ33.2 U33.2
DATA33: JP34.2 SJ34.2 U34.2
DATA34: JP35.2 SJ35.2 U35.2
DATA35: JP36.2 SJ36.2 U36.2
GND: C1.2 JP1.4 U1.1
GND1: C2.2 JP2.4 U2.1
GND2: C3.2 JP3.4 U3.1
GND3: C4.2 JP4.4 U4.1
GND4: C5.2 JP5.4 U5.1
GND5: C6.2 JP6.4 U6.1
GND6: C7.2 JP7.4 U7.1
GND7: C8.2 JP8.4 U8.1
GND8: C9.2 JP9.4 U9.1
GND9: C10.2 JP10.4 U10.1
GND10: C11.2 JP11.4 U11.1
GND11: C12.2 JP12.4 U12.1
GND12: C13.2 JP13.4 U13.1
GND13: C14.2 JP14.4 U14.1
GND14: C15.2 JP15.4 U15.1
GND15: C16.2 JP16.4 U16.1
GND16: C17.2 JP17.4 U17.1
GND17: C18.2 JP18.4 U18.1
GND18: C19.2 JP19.4 U19.1
GND19: C20.2 JP20.4 U20.1
GND20: C21.2 JP21.4 U21.1
GND21: C22.2 JP22.4 U22.1
GND22: C23.2 JP23.4 U23.1
GND23: C24.2 JP24.4 U24.1
GND24: C25.2 JP25.4 U25.1
GND25: C26.2 JP26.4 U26.1
GND26: C27.2 JP27.4 U27.1
GND27: C28.2 JP28.4 U28.1
GND28: C29.2 JP29.4 U29.1
GND29: C30.2 JP30.4 U30.1
GND30: C31.2 JP31.4 U31.1
GND31: C32.2 JP32.4 U32.1
GND32: C33.2 JP33.4 U33.1
GND33: C34.2 JP34.4 U34.1
GND34: C35.2 JP35.4 U35.1
GND35: C36.2 JP36.4 U36.1
N$1: R1.1 SJ1.1
N$2: R2.1 SJ2.1
N$3: R3.1 SJ3.1
N$4: R4.1 SJ4.1
N$5: R5.1 SJ5.1
N$6: R6.1 SJ6.1
N$7: R7.1 SJ7.1
N$8: R8.1 SJ8.1
N$9: R9.1 SJ9.1
N$10: R10.1 SJ10.1
N$11: R11.1 SJ11.1
N$12: R12.1 SJ12.1
N$13: R13.1 SJ13.1
N$14: R14.1 SJ14.1
N$15: R15.1 SJ15.1
N$16: R16.1 SJ16.1
N$17: R17.1 SJ17.1
N$18: R18.1 SJ18.1
N$19: R19.1 SJ19.1
N$20: R20.1 SJ20.1
N$21: R21.1 SJ21.1
N$22: R22.1 SJ22.1
N$23: R23.1 SJ23.1
N$24: R24.1 SJ24.1
N$25: R25.1 SJ25.1
N$26: R26.1 SJ26.1
N$27: R27.1 SJ27.1
N$28: R28.1 SJ28.1
N$29: R29.1 SJ29.1
N$30: R30.1 SJ30.1
N$31: R31.1 SJ31.1
N$32: R32.1 SJ32.1
N$33: R33.1 SJ33.1
N$34: R34.1 SJ34.1
N$35: R35.1 SJ35.1
N$36: R36.1 SJ36.1
SCK: JP1.1 U1.3
SCK1: JP2.1 U2.3
SCK2: JP3.1 U3.3
SCK3: JP4.1 U4.3
SCK4: JP5.1 U5.3
SCK5: JP6.1 U6.3
SCK6: JP7.1 U7.3
SCK7: JP8.1 U8.3
SCK8: JP9.1 U9.3
SCK9: JP10.1 U10.3
SCK10: JP11.1 U11.3
SCK11: JP12.1 U12.3
SCK12: JP13.1 U13.3
SCK13: JP14.1 U14.3
SCK14: JP15.1 U15.3
SCK15: JP16.1 U16.3
SCK16: JP17.1 U17.3
SCK17: JP18.1 U18.3
SCK18: JP19.1 U19.3
SCK19: JP20.1 U20.3
SCK20: JP21.1 U21.3
SCK21: JP22.1 U22.3
SCK22: JP23.1 U23.3
SCK23: JP24.1 U24.3
SCK24: JP25.1 U25.3
SCK25: JP26.1 U26.3
SCK26: JP27.1 U27.3
SCK27: JP28.1 U28.3
SCK28: JP29.1 U29.3
SCK29: JP30.1 U30.3
SCK30: JP31.1 U31.3
SCK31: JP32.1 U32.3
SCK32: JP33.1 U33.3
SCK33: JP34.1 U34.3
SCK34: JP35.1 U35.3
SCK35: JP36.1 U36.3
VCC: C1.1 JP1.3 R1.2 U1.4
VCC1: C2.1 JP2.3 R2.2 U2.4
VCC2: C3.1 JP3.3 R3.2 U3.4
VCC3: C4.1 JP4.3 R4.2 U4.4
VCC4: C5.1 JP5.3 R5.2 U5.4
VCC5: C6.1 JP6.3 R6.2 U6.4
VCC6: C7.1 JP7.3 R7.2 U7.4
VCC7: C8.1 JP8.3 R8.2 U8.4
VCC8: C9.1 JP9.3 R9.2 U9.4
VCC9: C10.1 JP10.3 R10.2 U10.4
VCC10: C11.1 JP11.3 R11.2 U11.4
VCC11: C12.1 JP12.3 R12.2 U12.4
VCC12: C13.1 JP13.3 R13.2 U13.4
VCC13: C14.1 JP14.3 R14.2 U14.4
VCC14: C15.1 JP15.3 R15.2 U15.4
VCC15: C16.1 JP16.3 R16.2 U16.4
VCC16: C17.1 JP17.3 R17.2 U17.4
VCC17: C18.1 JP18.3 R18.2 U18.4
VCC18: C19.1 JP19.3 R19.2 U19.4
VCC19: C20.1 JP20.3 R20.2 U20.4
VCC20: C21.1 JP21.3 R21.2 U21.4
VCC21: C22.1 JP22.3 R22.2 U22.4
VCC22: C23.1 JP23.3 R23.2 U23.4
VCC23: C24.1 JP24.3 R24.2 U24.4
VCC24: C25.1 JP25.3 R25.2 U25.4
VCC25: C26.1 JP26.3 R26.2 U26.4
VCC26: C27.1 JP27.3 R27.2 U27.4
VCC27: C28.1 JP28.3 R28.2 U28.4
VCC28: C29.1 JP29.3 R29.2 U29.4
VCC29: C30.1 JP30.3 R30.2 U30.4
VCC30: C31.1 JP31.3 R31.2 U31.4
VCC31: C32.1 JP32.3 R32.2 U32.4
VCC32: C33.1 JP33.3 R33.2 U33.4
VCC33: C34.1 JP34.3 R34.2 U34.4
VCC34: C35.1 JP35.3 R35.2 U35.4
VCC35: C36.1 JP36.3 R36.2 U36.4